# Altium PCB Glucometer-I.C.- Full V1.1.PcbDoc
Units mm, origin at the board's own origin, x right, y up, seen from the top; angles counter-clockwise.
Board outline 38.25 x 38.25 mm, 2 copper layers (Top Layer, Bottom Layer); 29 components, 30 nets, 125 pads, 15 vias.
Unrouted connection lines stored in the file: 2.
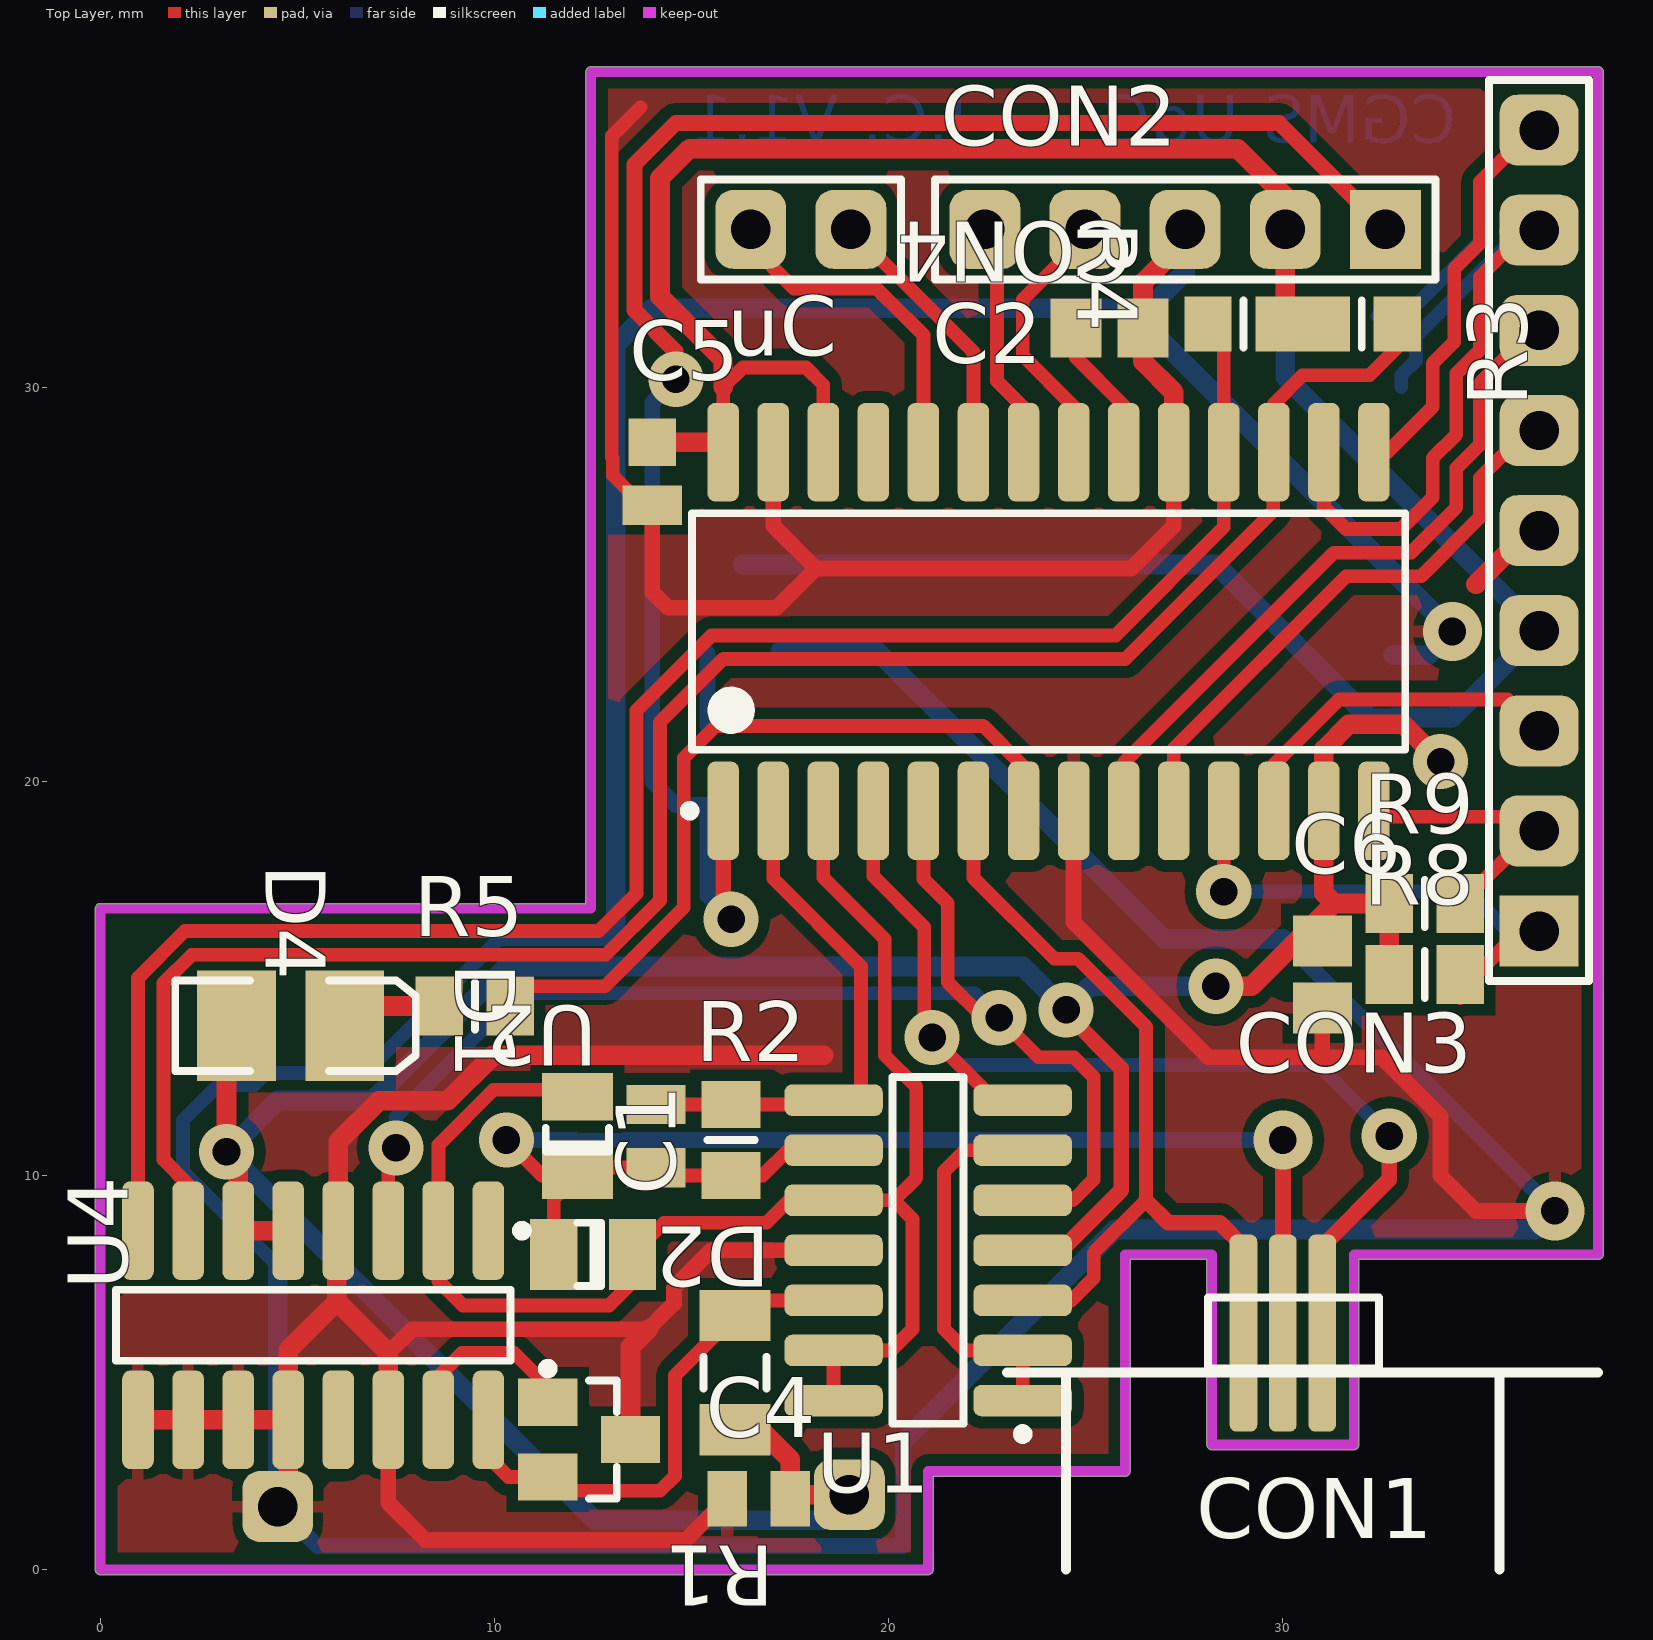
[diagram p0: Top Layer view]
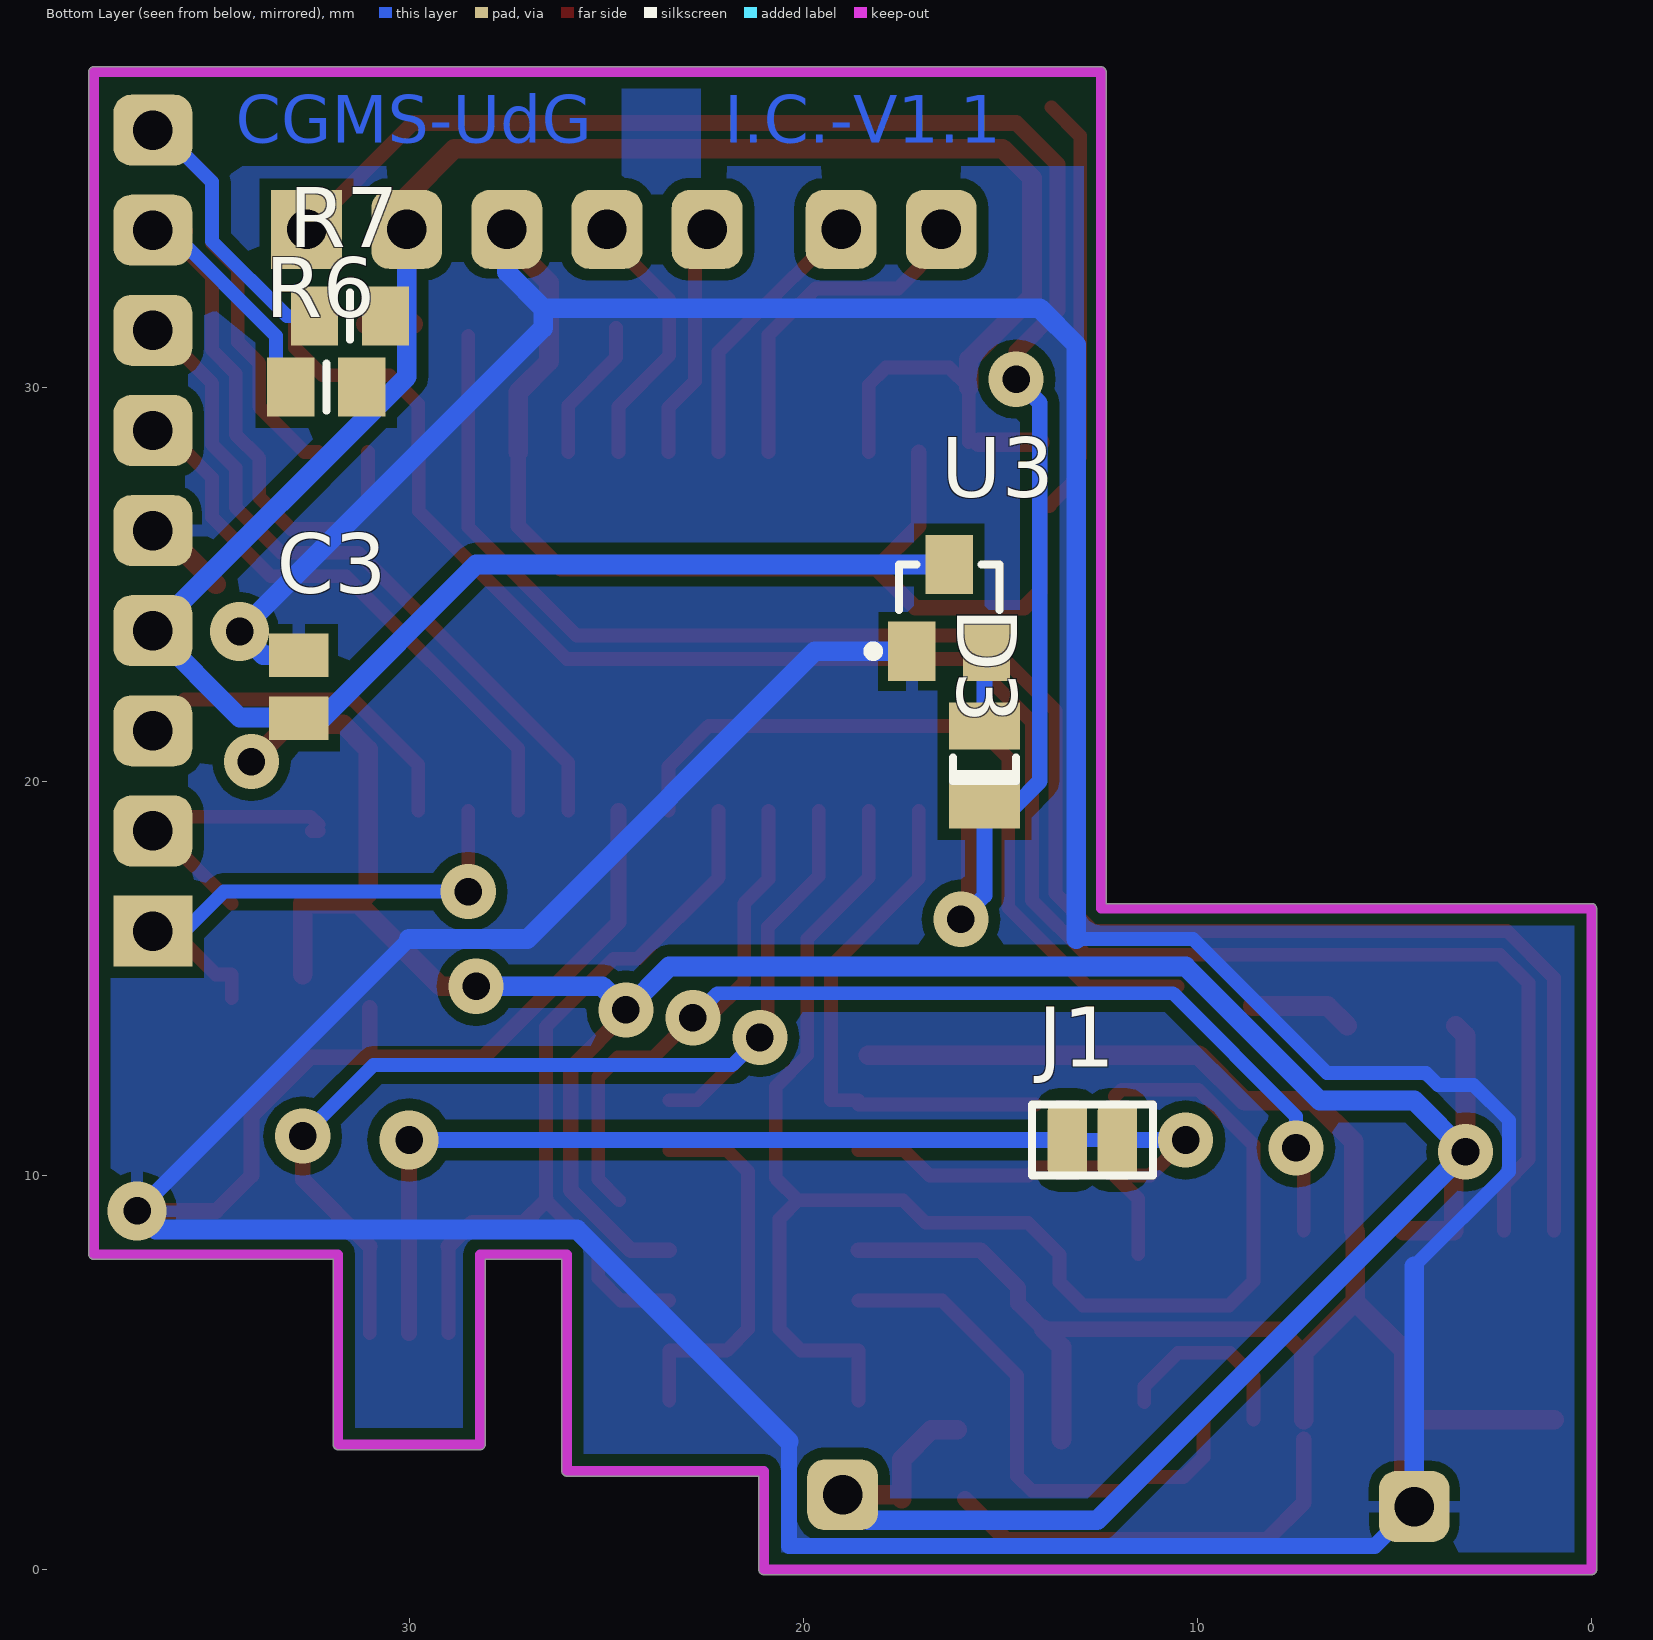
[diagram p1: Bottom Layer view, seen from below]

## Layer stack, top to bottom
Top Layer: signal copper 0.0356
Dielectric: dielectric 0.32, FR-4, Dk 4.8
Bottom Layer: signal copper 0.0356

## Board outline
-0.127,0 ccw(c0,0) 0,-0.127 21,-0.127 ccw(c21,0) 21.127,0 21.127,2.373 26,2.373 ccw(c26,2.5) 26.127,2.5 26.127,7.873 28.073,7.873 28.073,3.17 ccw(c28.2,3.17) 28.2,3.043 31.8,3.043 ccw(c31.8,3.17) 31.927,3.17 31.927,7.873 38,7.873 ccw(c38,8) 38.127,8 38.127,38 ccw(c38,38) 38,38.127 12.445,38.127 ccw(c12.445,38) 12.318,38 12.318,16.897 0,16.897 ccw(c0,16.77) -0.127,16.77

## Design rules (kind name [scope] priority, off if disabled: settings)
AssemblyTestPointUsage AssemblyTestPointUsage_1 [All] p2:
AssemblyTestpoint AssemblyTestpoint_1 [All] p2: testpointundercomponent=TRUE minsize=1.016 maxsize=2.54 preferedsize=1.524 minholesize=0 maxholesize=1.016 preferedholesize=0.813 testpointgrid=0.025 usegrid=TRUE gridtolerance=0 allowsidetop=TRUE allowsidebottom=TRUE
Clearance [All] p1: gap=0.2
ComponentClearance ComponentClearance_1 [All] p2: gap=0.254 collisioncheckmode=3 verticalgap=0.254 showdistances=FALSE
DiffPairsRouting DiffPairsRouting_1 [All] p2: maxlimit=0.254 minlimit=0.254 mostfreqgap=0.254 maxuncoupledlength=12.7
FabricationTestPointUsage TestPointUsage [All] p2: valid=0 allowmultiple=FALSE
FabricationTestpoint Testpoint [All] p2: side=3 testpointundercomponent=TRUE minsize=1.016 maxsize=2.54 preferedsize=1.524 minholesize=0 maxholesize=1.016 preferedholesize=0.813 testpointgrid=0.025 allowsidetop=TRUE allowsidebottom=TRUE usegrid=TRUE gridtolerance=0
FanoutControl Fanout_LCC [IsLCC] p1: bgadir=Out bgaviamode=Centered fanoutstyle=Auto fanoutdirection=Alternating viagrid=0.025 // Fanout_LCC (Default Rule)
FanoutControl Fanout_BGA [IsBGA] p2: bgadir=Out bgaviamode=Centered fanoutstyle=Auto fanoutdirection=Alternating viagrid=0.025 // Fanout_BGA (Default Rule)
FanoutControl Fanout_Default [All] p4: bgadir=Out bgaviamode=Centered fanoutstyle=Auto fanoutdirection=Alternating viagrid=0.025 // Fanout_Default (Default Rule)
FanoutControl Fanout_Small [(CompPinCount < 5)] p5: bgadir=Out bgaviamode=Centered fanoutstyle=Auto fanoutdirection=OutThenIn viagrid=0.025 // Fanout_Small (Default Rule)
FanoutControl Fanout_BGA_1 [IsBGA] p6: bgadir=Out bgaviamode=Centered fanoutstyle=Auto fanoutdirection=Alternating viagrid=0.025 // Fanout_BGA (Default Rule)
FanoutControl Fanout_LCC_1 [IsLCC] p7: bgadir=Out bgaviamode=Centered fanoutstyle=Auto fanoutdirection=Alternating viagrid=0.025 // Fanout_LCC (Default Rule)
FanoutControl Fanout_SOIC_1 [IsSOIC] p8: bgadir=Out bgaviamode=Centered fanoutstyle=Auto fanoutdirection=Alternating viagrid=0.025 // Fanout_SOIC (Default Rule)
FanoutControl Fanout_Small_1 [(CompPinCount < 5)] p9: bgadir=Out bgaviamode=Centered fanoutstyle=Auto fanoutdirection=OutThenIn viagrid=0.025 // Fanout_Small (Default Rule)
FanoutControl Fanout_Default_1 [All] p10: bgadir=Out bgaviamode=Centered fanoutstyle=Auto fanoutdirection=Alternating viagrid=0.025 // Fanout_Default (Default Rule)
Height Height_1 [All] p2: minheight=0 maxheight=25.4 prefheight=12.7
HoleSize [All] p1: absolutevalues=TRUE maxlimit=5 minlimit=0.025 maxpercent=80.000 minpercent=20.000
HoleSize HoleSize_1 [All] p2: absolutevalues=TRUE maxlimit=5 minlimit=0.025 maxpercent=80.000 minpercent=20.000
HoleToHoleClearance HoleToHoleClearance_1 [All] p2: gap=0.254 allowstackedmicrovias=TRUE
LayerPairs LayerPairs_1 [All] p2: enforce=TRUE
MinimumSolderMaskSliver MinimumSolderMaskSliver_1 [All] p2: minsoldermaskwidth=0.254
NetAntennae NetAntennae_1 [All] p2: netantennaetolerance=0
PasteMaskExpansion PasteMaskExpansion_1 [All] p2: expansion=0
PlaneClearance PlaneClearance_1 [All] p2: clearance=0.508
PlaneConnect [All] p1: planeconnectstyle=Relief reliefexpansion=0.508 reliefentries=4 reliefconductorwidth=0.3 reliefairgap=0.25
PolygonConnect [All] p1: connectstyle=Relief reliefconductorwidth=0.3 reliefentries=4 polygonreliefangle="90 Angle" airgapwidth=0.25
PolygonConnect PolygonConnect_1 [All] p2: connectstyle=Relief reliefconductorwidth=0.3 reliefentries=4 polygonreliefangle="90 Angle" airgapwidth=0.25
RoutingPriority RoutingPriority_1 [All] p2: routingpriority=0
RoutingTopology RoutingTopology_1 [All] p2: topology=Shortest
RoutingVias [All] p1: holewidth=0.7 width=1.5 viastyle="Through Hole" minholewidth=0.7 minwidth=1 maxholewidth=1 maxwidth=2
ShortCircuit ShortCircuit_1 [All] p2: allowed=FALSE
SilkToSilkClearance SilkToSilkClearance_1 [All] p2: silktosilkclearance=0.254
SilkToSolderMaskClearance SilkscreenOverComponentPads [IsPad] p2: minsilkscreentomaskgap=0.254 clearancetoexposedcopper=TRUE
SolderMaskExpansion [All] p1: expansion=0.102
SolderMaskExpansion SolderMaskExpansion_1 [All] p2: expansion=0.102
UnRoutedNet UnRoutedNet_1 [All] p2:
Width [All] p1: maxlimit=5 minlimit=0.25 preferedwidth=0.35 minimp=50.000000 maximp=50.000000 favimp=50.000000
22 further rules are at their usual default settings.

## Components (designator, comment, footprint, x,y, rotation, side; value= is the part's Value field where it differs from the comment)
C1 "Cap2" CAPC1608N#1 14.1,11 r90 top
C2 "Cap" CAPC2012N 25.6,31.5 r180 top
C3 "Cap" CAPC1608N#2 32.8,22.4 r270 bottom
C4 "Cap" CAPC1608N#3 16.7,1.8 r0 top
C5 "Cap" CAPC1608N#4 14,27.8 r90 top
C6 "Cap" CAPC2012N 31,15.1 r90 top
CON1 "MHDR1X3" MHDR1X3 29,6 r0 top
CON2 "Header 5" HDR1X5 32.6,34 r180 top
CON3 "Header 9" HDR1X9 36.5,16.2 r90 top
CON4 "Header 2" HDR1X2 16.5,34 r0 top
D1 "1N4148" CD3216-1206#1 12.1,10.9 r270 top
D2 "1N4148" CD3216-1206#2 12.4,8 r0 top
D3 "1N4148" CD3216-1206#1 15.4,20.3 r270 bottom
D4 "LED2" 3.2X1.6X1.1 4.8,13.8 r0 top
J1 "MHDR1X2" MHDR1X2 13.3,10.9 r180 bottom
R1 "Res1" RESC3216N 16.1,5 r270 top
R2 "Res1" RESC2012N#1 16,10.9 r270 top
R3 "Res1" RESC2012N#2 32,31.6 r0 top
R4 "Res1" RESC2012N#2 29,31.6 r180 top
R5 "Res1" RESC2012N#1 9.5,14.3 r180 top
R6 "Res1" RESC2012N#1 32.1,30 r0 bottom
R7 "Res1" RESC2012N#1 31.5,31.8 r0 bottom
R8 "Res1" RESC2012N#1 33.6,15.1 r0 top
R9 "Res1" RESC2012N#1 33.6,16.9 r0 top
U1 "LMC6044IN" M14A_N 21,8.1 r180 top
U2 "LM4041CEM3-ADJ/NOPB" MF03A_N 12.4,3.3 r0 top
U3 "Supply Voltage Supervisor" SOT23 16.3,24.4 r180 bottom
U4 "AD5242" R-16N_N 5.4,6.2 r270 top
uC "PIC24FJ64GA102-I/SO" SOIC-SO28_N 24.055,23.8 r90 top

## Footprints (in the part's own frame and the unit in brackets; to place one, negate y for a bottom-side part, rotate by r counter-clockwise, add the part's x,y. Pads: shape width x height; smd on the part's side, far side on the other; paste and mask are expansions set on the pad)
3.2X1.6X1.1 [mm] "SMT LED; 2 Flat Leads"
  rect 2x2.8 smd: 1(-1.35,0) 2(1.4,0)
  silkscreen extent -2.9,-1.15 3.2,1.15
CAPC1608N#1 [mm] "Chip Capacitor, Body 1.6x0.8mm, IPC Medium Density"
  rect 1x1.5 smd: 1(-0.8,0) 2(0.8,0)
  body extent -0.87,-0.48 0.87,0.48, height 0.85
CAPC1608N#2 [mm] "Chip Capacitor, Body 1.6x0.8mm, IPC Medium Density"
  rect 1.1x1.5 smd: 1(-0.8,0) 2(0.8,0)
  body extent -0.87,-0.48 0.87,0.48, height 0.85
CAPC1608N#3 [mm] "Chip Capacitor, Body 1.6x0.8mm, IPC Medium Density"
  rect 1x1.4 smd: 1(-0.8,0) 2(0.8,0)
  body extent -0.87,-0.48 0.87,0.48, height 0.85
CAPC1608N#4 [mm] "Chip Capacitor, Body 1.6x0.8mm, IPC Medium Density"
  rect 1x1.5 smd: 1(-0.8,0)
  rect 1.2x1.2 smd: 2(0.8,0)
  body extent -0.87,-0.48 0.87,0.48, height 0.85
CAPC2012N [mm] "Chip Capacitor, Body 2.0x1.3mm, IPC Medium Density"
  rect 1.3x1.5 smd: 1(-0.85,0) 2(0.85,0)
  body extent -1.1,-0.72 1.1,0.72, height 1.1
CD3216-1206#1 [mm] "Chip Diode; Body 3.2 x 1.6 mm (LxW typ)"
  rect 1.2x1.8 smd: 1(-1.1,0) 2(0.9,0)
  silkscreen extent -0.3,-0.8 0.3,0.8
CD3216-1206#2 [mm] "Chip Diode; Body 3.2 x 1.6 mm (LxW typ)"
  rect 1.2x1.8 smd: 1(-0.9,0) 2(1.1,0)
  silkscreen extent -0.3,-0.8 0.3,0.8
HDR1X2 [mm] "Connector; Header; 2 Position"
  rrect50% 1.8x2 hole 1: 1(0,0) 2(2.54,0)
  silkscreen extent -1.27,-1.27 3.81,1.27
HDR1X5 [mm] "Connector; Header; 5 Position"
  rect 1.8x2 hole 1: 1(0,0)
  rrect50% 1.8x2 hole 1: 2(2.54,0) 3(5.08,0) 4(7.62,0) 5(10.16,0)
  silkscreen extent -1.27,-1.27 11.43,1.27
HDR1X9 [mm] "Connector; Header; 9 Position"
  rect 1.8x2 hole 1: 1(0,0)
  rrect50% 1.8x2 hole 1: 2(2.54,0) 3(5.08,0) 4(7.62,0) 5(10.16,0) 6(12.7,0) 7(15.24,0) 8(17.78,0) 9(20.32,0)
  silkscreen extent -1.27,-1.27 21.59,1.27
M14A_N [mm] "SOIC, 14-Leads, Body 8.6x3.9mm, Pitch 1.27mm, IPC Medium Density"
  rrect50% 2.5x0.8 smd: 1(-2.4,3.81) 2(-2.4,2.54) 3(-2.4,1.27) 4(-2.4,0) 5(-2.4,-1.27) 6(-2.4,-2.54) 7(-2.4,-3.81) 8(2.4,-3.81) 9(2.4,-2.54) 10(2.4,-1.27) 11(2.4,0) 12(2.4,1.27) 13(2.4,2.54) 14(2.4,3.81)
  silkscreen extent -2.53,-4.4 0.9,4.78, body extent -2,-4.38 2,4.38, height 1.75
MF03A_N [mm] "SOT23, 3-Leads, Body 2.9x1.3mm, Pitch 0.95mm, Lead Span 2.4mm, IPC Medium Density"
  rect 1.5x1.2 smd: 1(-1.05,0.95) 2(-1.05,-0.95) 3(1.05,0)
  silkscreen extent -1.17,-1.5 0.7,1.92, body extent -0.7,-1.5 0.7,1.5, height 1.12
MHDR1X2 [mm] "Connector; Header; 2 Position"
  rrect50% 1x2 smd: 1(0,0) 2(1.27,0)
  silkscreen extent -0.9,-0.9 2.17,0.9
MHDR1X3 [mm] "Connector; Header; 3 Position"
  rrect50% 0.7x5 smd: 1(0,0) 2(1,0) 3(2,0)
  silkscreen extent -0.9,-0.9 3.44,0.9
R-16N_N [mm] "16-Pin Small Outline Integrated Circuit 1.27 mm Pitch, IPC Medium Density"
  rrect50% 2.5x0.8 smd: 1(-2.4,4.445) 2(-2.4,3.175) 3(-2.4,1.905) 4(-2.4,0.635) 5(-2.4,-0.635) 6(-2.4,-1.905) 7(-2.4,-3.175) 8(-2.4,-4.445) 9(2.4,-4.445) 10(2.4,-3.175) 11(2.4,-1.905) 12(2.4,-0.635) 13(2.4,0.635) 14(2.4,1.905) 15(2.4,3.175) 16(2.4,4.445)
  silkscreen extent -2.52,-5 0.9,5.42, body extent -1.95,-4.95 1.95,4.95, height 1.75
RESC2012N#1 [mm] "Chip Resistor, Body 2.0x1.3mm, IPC Medium Density"
  rect 1.2x1.5 smd: 1(-0.9,0) 2(0.9,0)
  silkscreen extent 0,-0.6 0,0.6, body extent -1.07,-0.7 1.07,0.7, height 0.65
RESC2012N#2 [mm] "Chip Resistor, Body 2.0x1.3mm, IPC Medium Density"
  rect 1.2x1.4 smd: 1(-0.9,0) 2(0.9,0)
  silkscreen extent 0,-0.6 0,0.6, body extent -1.07,-0.7 1.07,0.7, height 0.65
RESC3216N [mm] "Chip Resistor, Body 3.2x1.6mm, IPC Medium Density"
  rect 1.3x1.8 smd: 1(-1.45,0) 2(1.45,0)
  silkscreen extent -0.4,-0.8 0.4,0.8, body extent -1.68,-0.87 1.68,0.87, height 0.71
SOIC-SO28_N [mm] "SOIC, 28-Leads, Body 17.9x7.5mm, Pitch 1.27mm, IPC Medium Density"
  rrect50% 2.5x0.8 smd: 1(-4.55,8.255) 2(-4.55,6.985) 3(-4.55,5.715) 4(-4.55,4.445) 5(-4.55,3.175) 6(-4.55,1.905) 7(-4.55,0.635) 8(-4.55,-0.635) 9(-4.55,-1.905) 10(-4.55,-3.175) 11(-4.55,-4.445) 12(-4.55,-5.715) 13(-4.55,-6.985) 14(-4.55,-8.255) 15(4.55,-8.255) 16(4.55,-6.985) 17(4.55,-5.715) 18(4.55,-4.445) 19(4.55,-3.175) 20(4.55,-1.905) 21(4.55,-0.635) 22(4.55,0.635) 23(4.55,1.905) 24(4.55,3.175) 25(4.55,4.445) 26(4.55,5.715) 27(4.55,6.985) 28(4.55,8.255)
  silkscreen extent -4.67,-9.05 3,9.23, body extent -3.8,-9.06 3.8,9.06, height 2.65
SOT23 [mm] "SOT-23; 3 Leads; Body 3.0 x 2.6 mm, inc. leads (LxW max)"
  rect 1.2x1.5 smd: 1(-0.95,-1.1) 2(0.95,-1.1) 3(0,1.1)
  silkscreen extent -2.05,-1.22 1.28,1.1

## Part data
C1 C2 C3 C4 C5 C6: "Capacitor"
CON1: "Header, 3-Pin"
CON2: "Header, 5-Pin"
CON3: "Header, 9-Pin"
CON4 J1: "Header, 2-Pin"
D1 D2 D3: "High Conductance Fast Diode"
D4: "Typical RED, GREEN, YELLOW, AMBER GaAs LED"
R1 R2 R3 R4 R5 R6 R7 R8 R9: "Resistor"
U1: "CMOS Quad Micropower Operational Amplifier, 14-pin MDIP"
U2: "Precision Micropower Shunt Voltage Reference, 3-pin SOT-23, Pb-Free"
U4: "AD5242BR"
uC: "General purpose 16-bit Flash Microcontroller with nanoWatt XLP, 64KB Flash, 8KB SRAM, 28-Pin SOIC, Industrial Temperature"

## Free pads (board coordinates)
  rrect50% 1.8x1.8 hole 1: 0(19,1.9) 1(4.5,1.6)

## Via types
v1: diameter 1.4, hole 0.7, Top Layer to Bottom Layer, 11 vias
v2: diameter 1.5, hole 0.7, Top Layer to Bottom Layer, 3 vias
v3: diameter 1.4, hole 0.7, Top Layer to Bottom Layer, tented bottom, 1 vias

## Nets (pads, with @x,y where several pads share a name; then routed paths per layer and width w, separated by ;. In a path a pad name is that pad's centre, name@x,y a point inside that pad or via, vN(x,y) a via of type N, cw(c..) or ccw(c..) an arc to the next point about the centre after c; other vN are vias at no path point)
3.3V: C3.2 C4.2 C5.2 C6.2 CON2.2 CON3.4 D4.1 pad.0 R1.2 R3.1 R4.1 R6.1 R7.1 R8.1 R9.1 U1.4 U3.3 U4.5 U4.6 uC.13 uC.26 uC.28 | length 151.8
  Top Layer w0.35: uC.28@15.8,28.6 15.8,30 16.3,30.5 17.9,30.5 18.34,30.06 uC.26
  Top Layer w0.4: U1.4 24.375,8.1 25.9,9.625 25.9,12.715 v3@24.457,14.158
  Top Layer w0.5: D4.1 3.2,13.55 v1(3.2,10.6) 3.495,10.305 U4.6 U4.5 ; C5.2 uC.28@15.55,28.6 ; 15.8,30 15.8,30.7 14.2,32.3 14.2,35.3 14.95,36.05 28.85,36.05 30.06,34.84 CON2.2 30.06,31.76 R4.1 R3.1 ; R1.2 16.75,3.55 17.5,2.8 C4.2 17.6,1.9 pad.0 ; v1(28.3,14.8) 29.2,14.8 31.3,16.9 ; 31.04,17.16 uC.13 31.04,20.811 31.679,21.45 33.05,21.45 v1(34,20.5) ; 31.1,17.1 31.3,16.9 ; R8.1 R9.1 31.3,16.9
  Bottom Layer w0.5: U3.3 28.3,25.5 32.2,21.6 C3.2 ; pad.0 18.35,1.25 12.55,1.25 v1(3.2,10.6) 4.5,11.9 6.9,11.9 10.3,15.3 23.4,15.3 v3(24.5,14.2) 25.1,14.8 v1(28.3,14.8) ; CON2.2 30.06,30.26 CON3.4 34.3,21.62 C3.2@32.82,21.62
CNT: CON1.3 U1.7 uC.4 | length 27.7
  Top Layer w0.35: uC.4 19.61,17.59 20.9,16.3 20.9,13.7 v1(21.1,13.5) 22.69,11.91 U1.7 ; CON1.3 CON1.3@31,8.2
  Top Layer w0.4: CON1.3@31,8.2 32.7,9.9 v1(32.7,11)
  Bottom Layer w0.35: v1(21.1,13.5) 21.8,12.8 30.9,12.8 v1(32.7,11)
CSCON: CON3.7 uC.9 | length 17.8
  Top Layer w0.35: uC.9 25.96,20.46 31.3,25.8 33.249,25.8 34.4,26.951 34.4,27.949 35,28.549 35,30.1 36.34,31.44 CON3.7
CSDATA: CON3.3 uC.12 | length 9
  Top Layer w0.35: uC.12 29.77,20.425 31.42,22.075 35.705,22.075 CON3.3 CON3.3@36.455,21.325
GND: C2.1 C3.1 C4.1 C5.1 C6.1 CON2.3 CON3.5 pad.1 U1.11 U2.3 U3.1 U4.4 U4.9 U4.10 U4.11 U4.12 U4.14 uC.8 uC.19 uC.27 | length 250.4
  Top Layer w0.35: 13.7,37.1 12.975,36.375 12.975,28.225 13,28.2 13,27.764 C5.1@13.764,27
  Top Layer w0.4: U4.14@7.305,3.3 7.305,1.695 8.25,0.75 14.85,0.75 C4.1 ; 7.305,5.495 7.91,6.1 13.9,6.1 ; 13.675,5.875 14.55,6.75 14.55,7.15 15.5,8.1 U1.11 ; C5.1@13.764,27 C5.1 14,24.8 14.4,24.4 17.155,24.4 18.155,25.4 ; uC.27 17.07,26.485 18.155,25.4 ; uC.8 24.69,16.423 28.113,13 31,13 ; uC.19 27.23,26.475 26.155,25.4 18.155,25.4 ; C6.1 31,13 ; v2(36.9,9.1) 34.9,9.1 34,10 34,11.5 32.5,13 31,13
  Top Layer w0.5: U4.9 U4.10 U4.11 U4.12 ; pad.1@4.765,1.6 U4.12 ; U4.14 7.305,5.495 6,6.8 ; U2.3 13.45,5.65 13.9,6.1 ; 18.35,13.05 9.966,13.05 8.808,11.892 7.066,11.892 6.035,10.861 U4.4 6,8.565 6,6.8 ; uC.19 27.23,29.87 26.45,30.65 C2.1 26.45,32.65 27.52,33.72 CON2.3 ; 34.9,25 36.26,26.36 CON3.5 ; U4.12 4.765,5.565 6,6.8
  Bottom Layer w0.35: 4.5,7.7 2.1,10.1 2.1,11.4 2.997,12.297 3.897,12.297 4.2,12.6 6.716,12.6 10.116,16 13.072,16
  Bottom Layer w0.4: pad.1 5.5,0.6 20.365,0.6 20.365,3.252 ; 30,16 v2(36.9,9.1)
  Bottom Layer w0.5: pad.1 4.5,7.7 ; 13.072,16 13.072,31.072 14,32 26.6,32 ; U3.1 19.7,23.3 27,16 30,16 ; 20.365,3.252 25.74,8.627 36.427,8.627 v2(36.9,9.1) ; CON2.3 27.52,32.92 26.6,32 ; C3.1 33.7,23.2 v2(34.3,23.8) 26.6,31.5 26.6,32
IRQ1: CON3.1 R8.2 uC.11 | length 13.5
  Top Layer w0.35: v1(28.5,17.2) uC.11 ; R8.2@34.5,14.5 R8.2 34.9,15.1 36,16.2 CON3.1
  Bottom Layer w0.35: v1(28.5,17.2) 34.7,17.2 35.7,16.2 CON3.1
LED1: R5.1 uC.7 | length 19.4
  Top Layer w0.35: R5.1@10.5,14.8 12.8,14.8 14.8,16.8 14.8,20.587 15.613,21.4 22.4,21.4 23.42,20.38 uC.7
MCLR: CON2.1 D3.2 uC.1 | length 44.6
  Top Layer w0.3: v1@15.8,16.7 v1(16,16.5)
  Top Layer w0.4: v1(14.6,30.2) 14.6,30.9 13.55,31.95 13.55,35.65 14.6,36.7 29.9,36.7 CON2.1 ; v1@15.8,16.7 uC.1
  Bottom Layer w0.4: v1(14.6,30.2) 14,29.6 14,20 14.6,19.4 D3.2 15.4,17.1 v1(16,16.5)
NetC2_2: C2.2 uC.20 | length 3.7
  Top Layer w0.35: C2.2 24.75,30.75 25.96,29.54 uC.20
NetD3_1: D3.1 U3.2 | length 1.9
  Bottom Layer w0.4: U3.2 15.4,23.25 D3.1
NetD4_2: D4.2 R5.2 | length 2.6
  Top Layer w0.5: D4.2 6.7,14.3 R5.2
NetU1_1: U1.1 U1.2 U1.6 | length 9.7
  Top Layer w0.35: U1.1 U1.2 21.94,5.56 21.4,6.1 21.4,10.1 21.94,10.64 U1.6
NetuC_25: uC.25
PEGC2: CON2.5 uC.22 | length 6.1
  Top Layer w0.35: CON2.5 22.75,33.69 22.75,30.15 23.42,29.48 uC.22
PEGD2: CON2.4 uC.21 | length 6.8
  Top Layer w0.35: uC.21 24.69,29.51 23.4,30.8 23.4,32.225 CON2.4@25.078,33.903
REF: CON1.1 U1.3 uC.6 | length 21.8
  Top Layer w0.35: uC.6 22.15,17.55 24.2,15.5 24.8,15.5 26.525,13.775 26.525,9.366 25.2,8.041 25.2,7.4 24.63,6.83 U1.3 ; CON1.1 CON1.1@29,8.2
  Top Layer w0.4: 26.525,9.366 27.091,8.8 28.4,8.8 CON1.1@29,8.2
RESET: CON3.6 uC.10 | length 14.8
  Top Layer w0.35: uC.10 27.23,20.83 31.6,25.2 33.5,25.2 35,26.7 35,27.7 36.2,28.9 CON3.6
SCK: CON3.9 R7.2 uC.15 | length 17
  Top Layer w0.35: uC.15 32.65,28.35 33.8,29.5 33.8,30.597 34.345,31.142 34.345,32.994 35,33.649 35,35.2 36.32,36.52 CON3.9
  Bottom Layer w0.35: R7.2 33.1,31.8 35,33.7 35,35.2 CON3.9@36.32,36.52
SCL1: R3.2 U4.7 uC.17 | length 49.3
  Top Layer w0.35: U4.7 2.225,9.775 1.6,10.4 1.6,14.88 2.32,15.6 12.822,15.6 14.2,16.978 14.2,21.5 15.8,23.1 26,23.1 29.755,26.855 uC.17@29.755,28.335 ; uC.17 29.77,29.57 30.5,30.3 32.2,30.3 32.9,31 R3.2
SDA1: R4.2 U4.8 uC.18 | length 46.3
  Top Layer w0.35: U4.8 0.955,15.013 2.142,16.2 12.644,16.2 13.6,17.156 13.6,21.8 15.5,23.7 17.5,23.7 25.751,23.7 28.5,26.449 uC.18 R4.2@28.5,31.3
SDI: CON3.8 R6.2 uC.16 | length 19.4
  Top Layer w0.3: CON3.8@36.16,33.96 36.48,33.96 CON3.8@36.5,33.96
  Top Layer w0.35: uC.16 31.04,26.96 31.6,26.4 33,26.4 33.8,27.2 33.8,28.197 34.4,28.797 34.4,30.349 35,30.949 35,32.8 CON3.8@36.16,33.96 ; CON3.8@35.66,33.96 CON3.8@36.16,33.96 ; CON3.8@36.48,33.96 CON3.8 36.18,33.98 CON3.8@36.16,33.96
  Bottom Layer w0.35: R6.2 33,30.3 33.375,30.675 33.375,31.297 36.058,33.98 CON3.8
SDO: CON3.2 R9.2 uC.14 | length 7.4
  Top Layer w0.35: uC.14@32.3,18.74 uC.14@32.46,18.74 ; uC.14@32.3,18.9 32.5,19.1 36.14,19.1 CON3.2 36.34,18.74 R9.2
U1RX: CON4.2 uC.23 | length 6.9
  Top Layer w0.35: CON4.2 20.24,32.8 20.249,32.8 21.48,31.569 21.48,31.56 22.15,30.89 uC.23
U1TX: CON4.1 uC.24 | length 8.7
  Top Layer w0.35: CON4.1 16.5,33.6 17.6,32.5 19.691,32.5 19.991,32.2 20,32.2 20.88,31.32 uC.24
VCTRL: U1.5 U4.3 uC.5 | length 32.5
  Top Layer w0.35: U4.3 7.305,10.505 v1(7.5,10.7) ; uC.5 20.88,17.52 21.5,16.9 21.5,14.9 22.4,14 v1(22.8,14) 23.8,13 24.7,13 25.2,12.5 25.2,9.9 24.67,9.37
  Bottom Layer w0.35: v1(7.5,10.7) 7.5,11.5 10.625,14.625 22.175,14.625 v1(22.8,14)
VGND: D1.1 D2.2 U1.10 U1.13 U1.14 U4.2 uC.3 | length 39
  Top Layer w0.35: D1.1 11.925,12.175 9.975,12.175 8.575,10.775 8.575,7.325 9.2,6.7 12.9,6.7 13.5,7.3 D2.2 14.3,8.8 16.9,8.8 17.47,9.37 U1.10 20.13,9.37 ; uC.3 18.34,17.56 19.9,16 19.9,13.049 20.7,12.249 20.7,9.94 20.13,9.37 ; U1.14 U1.13 20.06,5.56 20.6,6.1 20.6,8.9 20.13,9.37
VOUT: C1.2 R2.1 U1.8 uC.2 | length 13.5
  Top Layer w0.35: C1.2 R2.1 U1.8@18.6,11.8 ; uC.2 17.07,17.53 19.3,15.3 19.3,11.91 U1.8
VREFH: R1.1 U1.12 U2.2 U4.16 | length 13.5
  Top Layer w0.35: U4.16 9.845,2.855 10.35,2.35 U2.2 11.7,2 14.2,2 14.575,2.375 14.575,4.925 R1.1 16.48,6.83 U1.12
VREFW: U2.1 U4.15 | length 4.9
  Top Layer w0.35: U4.15 8.575,4.9 9.175,5.5 10.5,5.5 11.35,4.65 U2.1
WRK: C1.1 CON1.2 D1.2 D2.1 J1.1 J1.2 R2.2 U1.9 | length 35.9
  Top Layer w0.3: C1.1 C1.1@14.3,10
  Top Layer w0.35: v1(10.3,10.9) 11.2,10 D1.2 11.5,9.4 D2.1 ; D1.2@12.1,10.2 C1.1 ; C1.1@14.3,10 R2.2 16.8,10 17.44,10.64 U1.9
  Top Layer w0.4: CON1.2 v2(30,10.9)
  Bottom Layer w0.35: J1.2 J1.1
  Bottom Layer w0.4: v1(10.3,10.9) J1.2 ; J1.1 v2(30,10.9)
pads on no net: U4.1 U4.13

## Polygon pours and split planes (outlines as drawn)
GND on Top Layer "Bottom Layer-No Net" (solid, pour order 8): 12.445,38 38,38 38,8 31.8,8 31.8,3.17 28.2,3.17 28.2,8 26,8 26,2.5 21,2.5 21,0 0,0 0,16.77 12.445,16.77
GND on Bottom Layer "Bottom Layer-No Net" (solid, pour order 10): 12.445,38 38,38 38,8 31.8,8 31.8,3.17 28.2,3.17 28.2,8 26,8 26,2.5 21,2.5 21,0 0,0 0,16.77 0.13,16.9 12.445,16.9 12.445,16.77

## Keep-outs
Keep-Out Layer:
  lines w0.254: 0,15.9 0,0 ; 0,0 21,0 21,2.5 26,2.5 26,8 28.2,8 28.2,3.17 31.8,3.17 31.8,8 38,8 38,38 12.445,38 12.445,16.77 0,16.77 0,0

## Other copper
Bottom Layer:
  text "I.C.-V1.1" at 22,36.2 h1.2
  text "CGMS-UdG" at 34.4,36.2 h1.2

## Silkscreen, mask and mechanical layers (free items; w line width, h text height)
Top Overlay:
  lines w0.254: 23,5 38,5 ; 24.5,0 24.5,5 ; 35.5,0 35.5,5
Mechanical 16:
  lines w0.127: -132.175,-31.975 -127.095,-31.975 ; -132.175,22 -127.095,22 ; -132.175,75.975 -127.095,75.975 ; -62.325,-85.95 -62.325,-80.87 ; -62.325,124.87 -62.325,129.95 ; 7.525,-85.95 7.525,-80.87 ; 7.525,124.87 7.525,129.95 ; 77.375,-85.95 77.375,-80.87 ; 77.375,124.87 77.375,129.95 ; 142.145,-31.975 147.225,-31.975 ; 142.145,22 147.225,22 ; 142.145,75.975 147.225,75.975 ; -132.175,-85.95 147.225,-85.95 147.225,129.95 -132.175,129.95 -132.175,-85.95 ; -127.095,-80.87 -127.095,124.87 142.145,124.87 142.145,-80.87 -127.095,-80.87
  text "1" at -97.851,126.521 h1.78
  text "2" at -27.984,126.521 h1.78
  text "3" at 41.739,126.521 h1.78
  text "4" at 111.614,126.521 h1.78
  text "A" at -130.27,100.664 h1.78
  text "A" at 144.05,100.664 h1.78
  text "B" at 144.425,49.35 h1.78
  text "B" at -130.27,46.689 h1.78
  text "C" at -130.27,-7.286 h1.78
  text "C" at 144.05,-7.286 h1.78
  text "D" at -130.27,-61.134 h1.78
  text "D" at 144.05,-61.134 h1.78
  text "1" at -97.851,-84.299 h1.78
  text "2" at -27.984,-84.299 h1.78
  text "3" at 41.739,-84.299 h1.78
  text "4" at 111.614,-84.299 h1.78

## Dimensions
0,42 to 42,42 on Top Overlay